# EAGLE board power_supply (EAGLE 8.2.2)
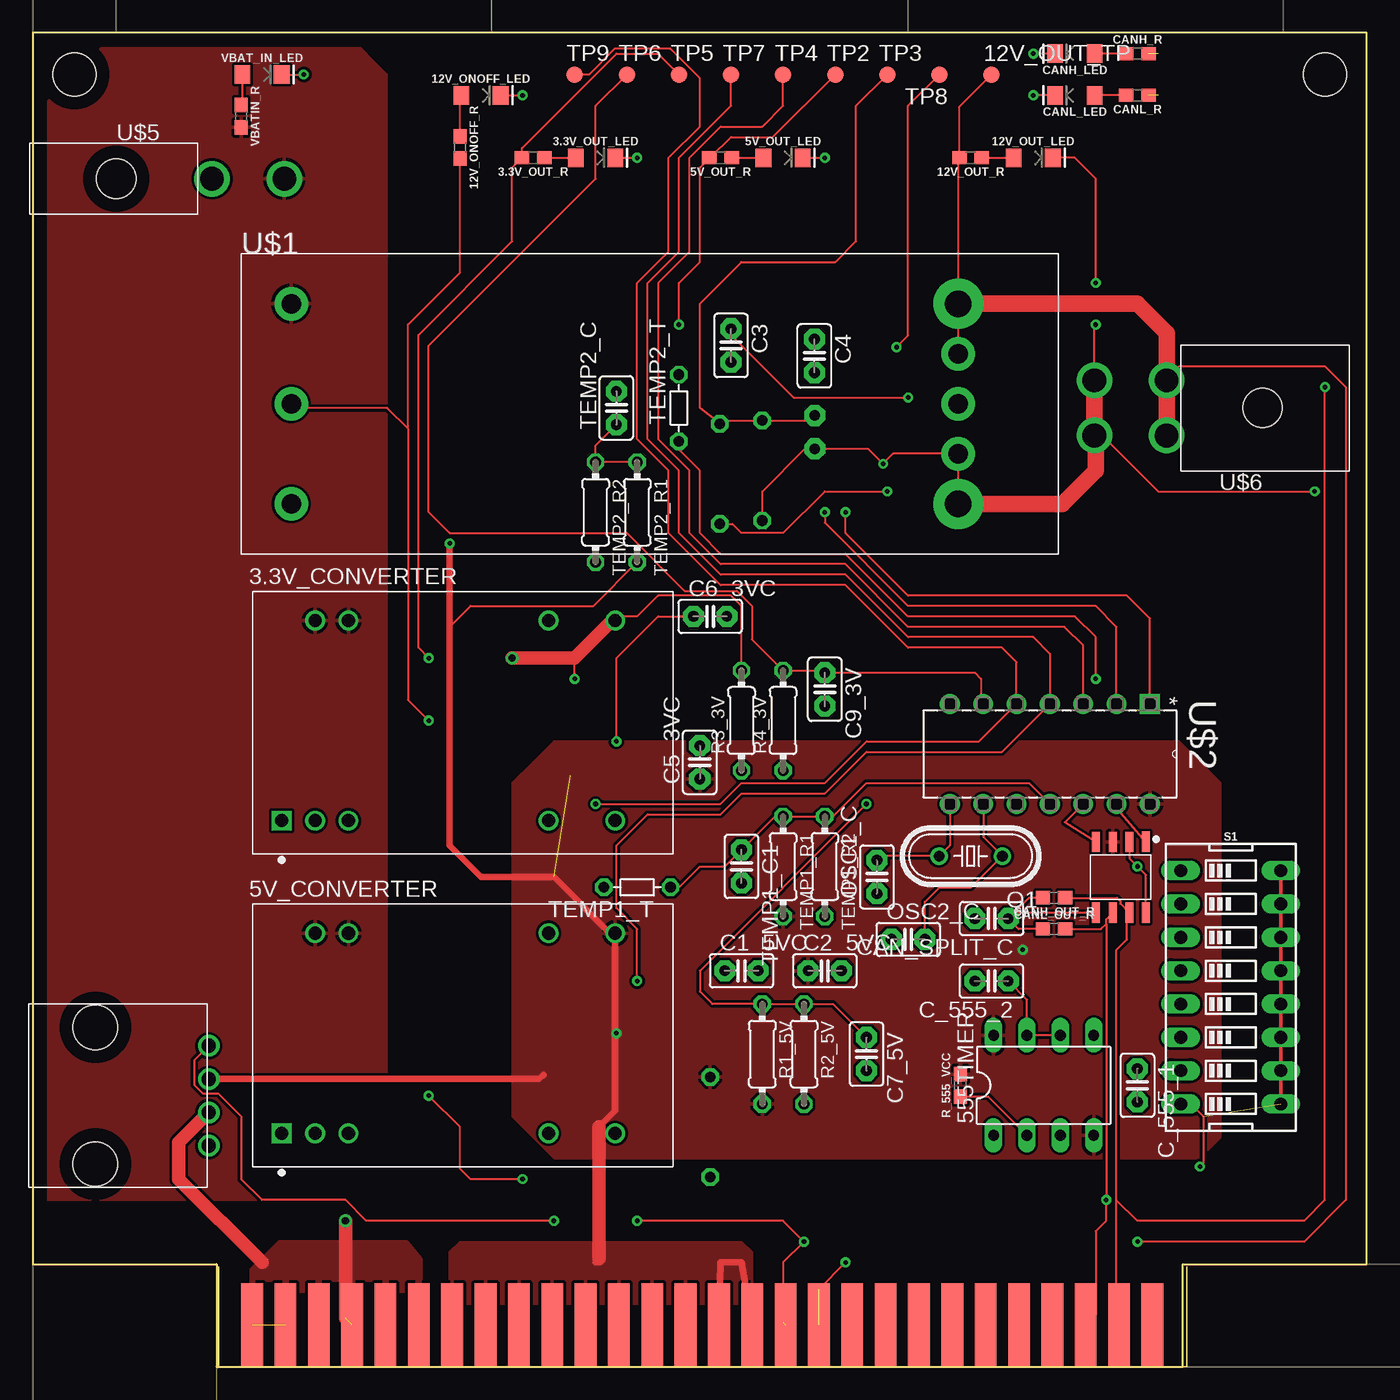
[diagram p0: board, top side]
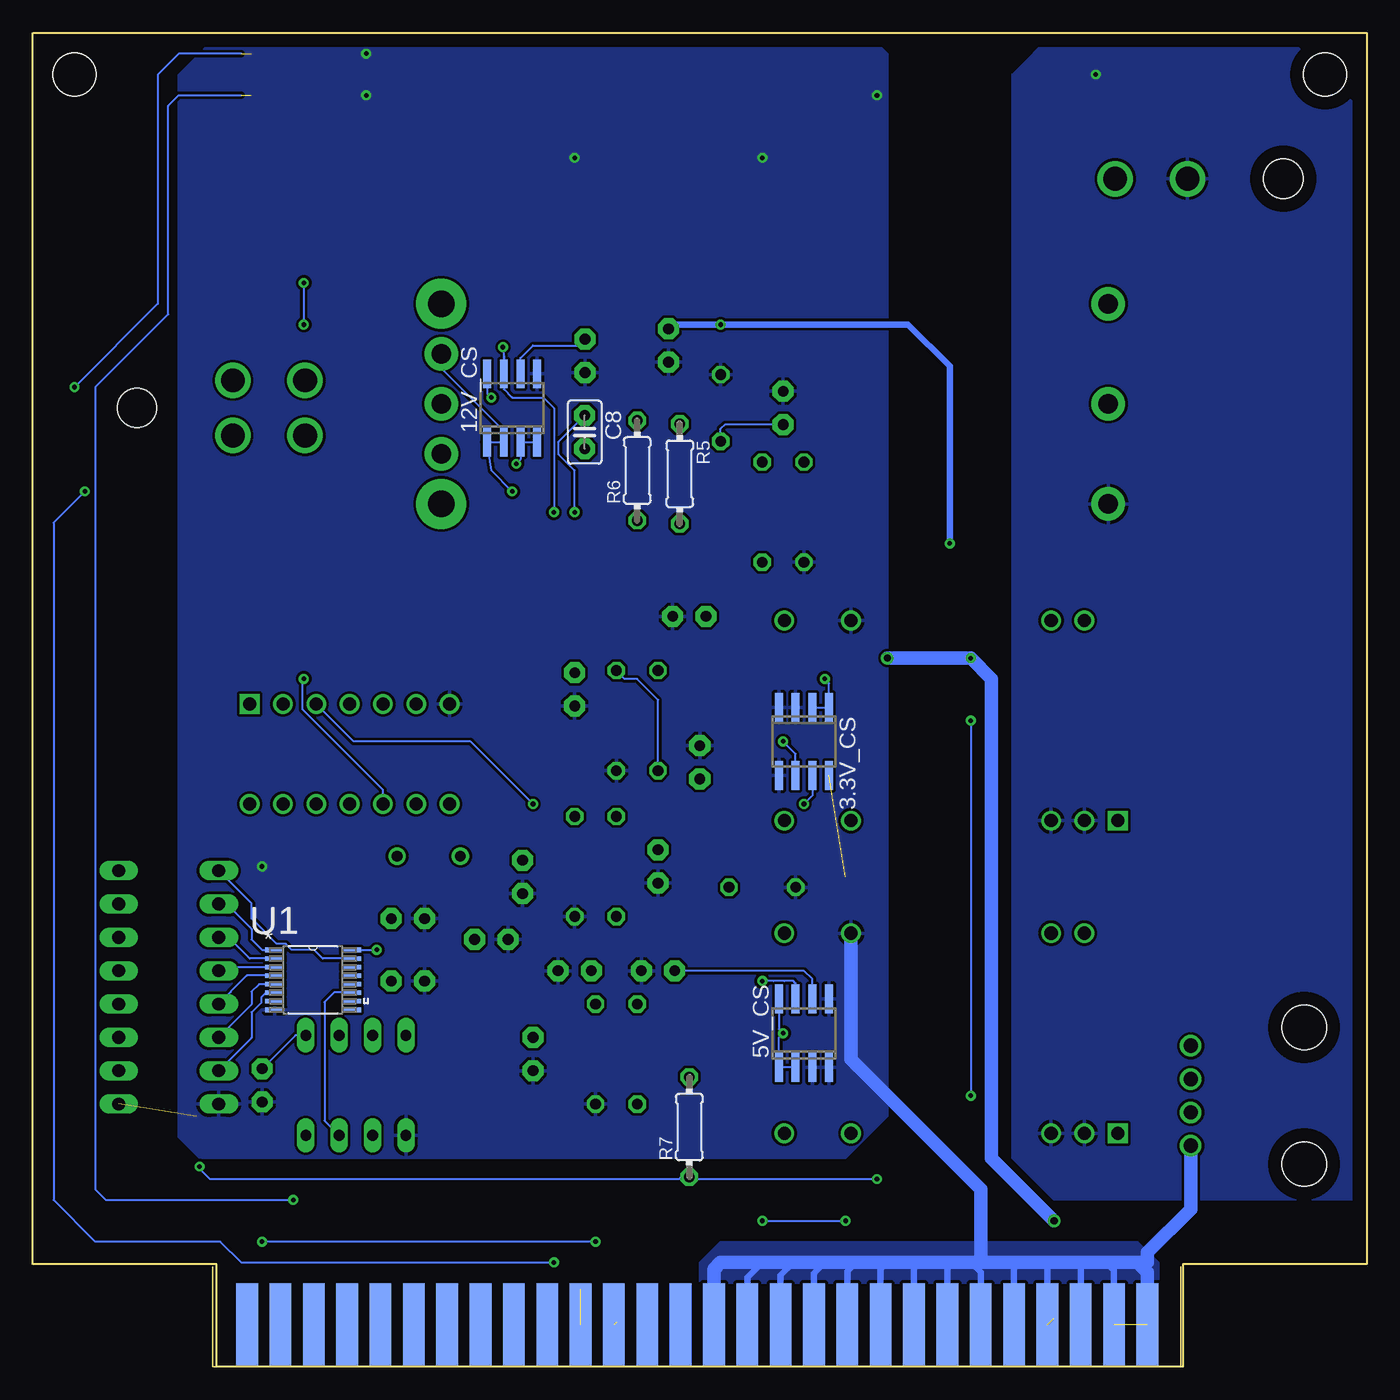
[diagram p1: board, bottom side, seen from below]

Size 101.6 x 101.6 mm. Coordinates in mm from the lower left corner, seen from the top.
Outline: 14,0 87.6,0 87.6,7.8 101.6,7.8 101.6,101.6 0,101.6 0,7.8 14,7.8 14,0
Copper layers (1*16): Top 0.035mm / dielectric 1.5mm / Bottom 0.035mm
Design rules "battery_balancer": minimum track width 6mil, minimum drill 0.35mm, track to track 0.205mm, track to pad 0.205mm, pad to pad 0.205mm, via to via 0.205mm, smd to smd 6mil, copper to edge 40mil, drill to drill 6mil, minimum pad ring 10mil, minimum via ring 8mil, stop-mask expansion 4mil, vias tented up to drill 0mil, thermal gap 10mil
Net classes: 1 3.3V_class: clearance 0.127 mm; 3 GND: clearance 0.025 mm
Holes 3.26 mm at 98.42,98.42 3.17,98.42

## Footprints (pad centres in the part's own frame; a part is rotated, then mirrored left to right if it is on the bottom)
CONV_NCS12S1203C = drill 1 square: 1 -12.79,-7.62 | drill 1: 2 -10.25,-7.62; 3 -7.71,-7.62; 9 7.53,-7.62; 11 12.61,-7.62; 14 12.61,7.62; 16 7.53,7.62; 22 -7.71,7.62; 23 -10.25,7.62
SOIC8 = smd 0.6 x 2.2: 1 -1.905,-2.6; 2 -0.635,-2.6; 3 0.635,-2.6; 4 1.905,-2.6; 5 1.905,2.6; 6 0.635,2.6; 7 -0.635,2.6; 8 -1.905,2.6
LED-1206 = smd 1.2 x 1.4: A -1.5,0; C 1.5,0
0603 = smd 1.1 x 1: 1 -0.85,0; 2 0.85,0
CONV_NCS12S1205C = drill 1 square: 1 -12.79,-7.62 | drill 1: 2 -10.25,-7.62; 3 -7.71,-7.62; 9 7.53,-7.62; 11 12.61,-7.62; 14 12.61,7.62; 16 7.53,7.62; 22 -7.71,7.62; 23 -10.25,7.62
B1,27 = smd 1.27 x 1.27: TP 0,0
DIL-08 = drill 0.813 long: 1 -3.81,-3.81; 2 -1.27,-3.81; 3 1.27,-3.81; 4 3.81,-3.81; 5 3.81,3.81; 6 1.27,3.81; 7 -1.27,3.81; 8 -3.81,3.81
C2.5-2 = drill 0.813 pad 1.6 octagon: 1 -1.27,0; 2 1.27,0
SOIC8' = smd 0.6 x 1.55: P$1 -3.83,-0.29; P$2 -2.57,-0.28; P$3 -1.29,-0.28; P$4 -0.02,-0.28; P$5 -0.02,5.11; P$6 -1.29,5.11; P$7 -2.57,5.11; P$8 -3.83,5.11
HC49/S = drill 0.813: 1 -2.413,0; 2 2.413,0
0204/7 = drill 0.813 octagon: 1 -3.81,0; 2 3.81,0
DIPSWITCH-08 = drill 0.97 long: 1 -8.89,-3.81; 2 -6.35,-3.81; 3 -3.81,-3.81; 4 -1.27,-3.81; 5 1.27,-3.81; 6 3.81,-3.81; 7 6.35,-3.81; 8 8.89,-3.81; 9 8.89,3.81; 10 6.35,3.81; 11 3.81,3.81; 12 1.27,3.81; 13 -1.27,3.81; 14 -3.81,3.81; 15 -6.35,3.81; 16 -8.89,3.81
R-5 = drill 0.813 octagon: 1 -2.54,0; 2 2.54,0
SOP65P640X120-16N = smd 1.473 x 0.356: 1 -2.921,2.286; 2 -2.921,1.626; 3 -2.921,0.965; 4 -2.921,0.33; 5 -2.921,-0.33; 6 -2.921,-0.965; 7 -2.921,-1.626; 8 -2.921,-2.286; 9 2.921,-2.286; 10 2.921,-1.626; 11 2.921,-0.965; 12 2.921,-0.33; 13 2.921,0.33; 14 2.921,0.965; 15 2.921,1.626; 16 2.921,2.286
UIE48T10120 = drill 1.5 pad 2.54: ON/OFF 3.81,11.43; TRIM 54.61,11.43; VIN(+) 3.81,19.05; VIN(-) 3.81,3.81; VOUT_SENSE(+) 54.61,15.24; VOUT_SENSE(-) 54.61,7.62 | drill 2 pad 3.81: VOUT(+) 54.61,19.05; VOUT(-) 54.61,3.81
DIP254P762X432-14 = drill 0.991 square: 1 -7.62,15.24 | drill 0.991: 2 -7.62,12.7; 3 -7.62,10.16; 4 -7.62,7.62; 5 -7.62,5.08; 6 -7.62,2.54; 7 -7.62,0; 8 0,0; 9 0,2.54; 10 0,5.08; 11 0,7.62; 12 0,10.16; 13 0,12.7; 14 0,15.24
5530843-6-BOARD = smd 1.651 x 6.35: 1 0.826,3.175; 3 3.365,3.175; 5 5.905,3.175; 7 8.445,3.175; 9 10.986,3.175; 11 13.525,3.175; 13 16.066,3.175; 15 18.605,3.175; 17 21.145,3.175; 19 23.686,3.175; 21 26.226,3.175; 23 28.765,3.175; 25 31.305,3.175; 27 33.846,3.175; 29 36.386,3.175; 31 38.925,3.175; 33 41.465,3.175; 35 44.005,3.175; 37 46.545,3.175; 39 49.086,3.175; 41 51.626,3.175; 43 54.166,3.175; 45 56.706,3.175; 47 59.245,3.175; 49 61.785,3.175; 51 64.326,3.175; 53 66.865,3.175; 55 69.406,3.175 | smd 1.651 x 6.35 bottom: 2 0.826,3.175; 4 3.365,3.175; 6 5.905,3.175; 8 8.445,3.175; 10 10.986,3.175; 12 13.525,3.175; 14 16.066,3.175; 16 18.605,3.175; 18 21.145,3.175; 20 23.686,3.175; 22 26.226,3.175; 24 28.765,3.175; 26 31.305,3.175; 28 33.846,3.175; 30 36.386,3.175; 32 38.925,3.175; 34 41.465,3.175; 36 44.005,3.175; 38 46.545,3.175; 40 49.086,3.175; 42 51.626,3.175; 44 54.166,3.175; 46 56.706,3.175; 48 59.245,3.175; 50 61.785,3.175; 52 64.326,3.175; 54 66.865,3.175; 56 69.406,3.175
5569-02A2 = drill 1.8: 1 7.3,0; 2 12.8,0 | hole 3: 0,0
5569-04A2 = drill 1.8: 1 7.3,-2.1; 2 7.3,2.1; 3 12.8,-2.1; 4 12.8,2.1 | hole 3: 0,0
70555-0003 = drill 1.092: 1 8.636,-3.81; 2 8.636,-1.27; 3 8.636,1.27; 4 8.636,3.81 | hole 3.4: 0,5.207; 0,-5.207

## Placement (x,y rotation side)
3.3V_CONVERTER  NCS12S1203C  [CONV_NCS12S1203C]  31.75,49.21 0 top
3.3V_CS  ACS712-LC  [SOIC8]  42.86,47.62 180 bottom
3.3V_OUT_LED  [LED-1206]  42.86,92.08 0 top
3.3V_OUT_R  330  [0603]  38.1,92.08 180 top
5V_CONVERTER  NCS12S1205C  [CONV_NCS12S1205C]  31.75,25.4 0 top
5V_CS  ACS712-LC  [SOIC8]  42.86,25.4 0 bottom
5V_OUT_LED  [LED-1206]  57.15,92.08 0 top
5V_OUT_R  330  [0603]  52.39,92.08 180 top
12V_CS  ACS712-LC  [SOIC8]  65.09,73.03 0 bottom
12V_ONOFF_LED  [LED-1206]  34.13,96.84 0 top
12V_ONOFF_R  330  [0603]  32.54,92.87 270 top
12V_OUT_LED  [LED-1206]  76.2,92.08 0 top
12V_OUT_R  330  [0603]  71.44,92.08 180 top
12V_OUT_TP  PTR1B1,27  [B1,27]  73.03,98.42 0 top
555TIMER  NE555  [DIL-08]  76.99,21.43 0 top
C1_5VC  1 nF  [C2.5-2]  53.98,30.16 0 top
C2_5VC  0.1 uF  [C2.5-2]  60.33,30.16 0 top
C3  0.1 uF  [C2.5-2]  53.18,77.79 270 top
C4  1 nF  [C2.5-2]  59.53,76.99 270 top
C5_3VC  0.1 uF  [C2.5-2]  50.8,46.04 90 top
C6_3VC  1 nF  [C2.5-2]  51.59,57.15 0 top
C7_5V  0.1 uF  [C2.5-2]  63.5,23.81 270 top
C8  0.1 uF  [C2.5-2]  59.56,71.18 270 bottom
C9_3V  0.1 uF  [C2.5-2]  60.33,51.59 270 top
C_555_1  10nF  [C2.5-2]  84.14,21.43 270 top
C_555_2  100 uF  [C2.5-2]  73.03,29.37 180 top
CAN_SPLIT_C  4700pF  [C2.5-2]  73.03,34.13 180 top
CANH_LED  [LED-1206]  79.38,100.01 180 top
CANH_OUT_R  60  [0603]  77.79,35.72 180 top
CANH_R  330  [0603]  84.14,100.01 0 top
CANL_LED  [LED-1206]  79.38,96.84 180 top
CANL_OUT_R  60  [0603]  77.79,33.34 0 top
CANL_R  330  [0603]  84.14,96.84 180 top
MCP2561  MCP2561  [SOIC8']  80.96,39.69 180 top
OSC1_C  1nF  [C2.5-2]  64.29,37.31 90 top
OSC2_C  1 nF  [C2.5-2]  66.67,32.54 0 top
Q1  [HC49/S]  71.44,38.89 180 top
R1_5V  [0204/7]  55.56,23.81 270 top
R2_5V  [0204/7]  58.74,23.81 270 top
R3_3V  [0204/7]  53.98,49.21 90 top
R4_3V  [0204/7]  57.15,49.21 90 top
R5  [0204/7]  52.32,68.01 270 bottom
R6  [0204/7]  55.56,68.26 90 bottom
R7  [0204/7]  51.59,18.26 90 bottom
R_555_VCC  10000  [0603]  70.64,21.43 90 top
S1  [DIPSWITCH-08]  91.25,28.89 270 top
TEMP1_C1  0.1 uF  [C2.5-2]  53.98,38.1 270 top
TEMP1_R1  [0204/7]  57.15,38.1 270 top
TEMP1_R2  [0204/7]  60.33,38.1 270 top
TEMP1_T  THERMISTOR-5  [R-5]  46.04,36.51 180 top
TEMP2_C  0.1 uF  [C2.5-2]  44.45,73.03 90 top
TEMP2_R1  [0204/7]  46.04,65.09 270 top
TEMP2_R2  [0204/7]  42.86,65.09 270 top
TEMP2_T  THERMISTOR-5  [R-5]  49.21,73.03 90 top
TP2  PTR1B1,27  [B1,27]  61.12,98.42 0 top
TP3  PTR1B1,27  [B1,27]  65.09,98.42 0 top
TP4  PTR1B1,27  [B1,27]  57.15,98.42 0 top
TP5  PTR1B1,27  [B1,27]  49.21,98.42 0 top
TP6  PTR1B1,27  [B1,27]  45.24,98.42 0 top
TP7  PTR1B1,27  [B1,27]  53.18,98.42 0 top
TP8  PTR1B1,27  [B1,27]  69.06,98.42 180 top
TP9  PTR1B1,27  [B1,27]  41.27,98.42 0 top
U1  SN74HC595PW  [SOP65P640X120-16N]  80.26,29.46 0 bottom
U$1  UIE48T10120  [UIE48T10120]  15.88,61.91 0 top
U$2  MCP25020-I/P  [DIP254P762X432-14]  69.85,42.86 270 top
U$4  5530843-6-STS  [5530843-6-BOARD]  15.88,0 0 top
U$5  39-30-1020  [5569-02A2]  6.35,90.49 0 top
U$6  39-30-1040  [5569-04A2]  93.66,73.03 180 top
U$7  70555-0003  [70555-0003]  4.76,20.64 0 top
VBAT_IN_LED  [LED-1206]  17.46,98.42 0 top
VBATIN_R  330  [0603]  15.88,95.25 270 top

## Library data of the parts
3.3V_CONVERTER U$1 = NCS12S1205C
3.3V_CS 5V_CS 12V_CS = allegro-2
3.3V_OUT_LED 5V_OUT_LED 12V_ONOFF_LED 12V_OUT_LED CANH_LED CANL_LED VBAT_IN_LED = SparkFun-LED
3.3V_OUT_R 5V_OUT_R 12V_ONOFF_R 12V_OUT_R CANH_OUT_R CANH_R CANL_OUT_R CANL_R R_555_VCC VBATIN_R = SparkFun-Resistors; PROD_ID: RES-08609
5V_CONVERTER = NCS12S1205C; AVAILABILITY: Bad; DESCRIPTION: Isolated Board Mount DC/DC Converter%2C DIP%2C Fixed%2C Through Hole%2C 12 W%2C 5 V%2C 2.4 A; MF: Murata Power Solutions; MP: NCS12S1205C; PACKAGE: DIP-8 Murata Power Solutions; PRICE: 28.15 USD
12V_OUT_TP TP2-TP9 = testpad
555TIMER = st-microelectronics; MF: Arrow Electronics; MPN: NE555N; OC_FARNELL: 1467742; OC_NEWARK: 89K1486
C1_5VC C2_5VC C3 C4 C5_3VC C6_3VC C7_5V C8 C9_3V C_555_1 C_555_2 CAN_SPLIT_C OSC1_C OSC2_C TEMP1_C1 TEMP2_C = capacitor-wima
MCP2561 = MCP2561; AVAILABILITY: Warning; DESCRIPTION: MCP2561 Series 5.5 V 8 Mbps High-Speed CAN Flexible Data Rate Transceiver-SOIC-8; MF: Microchip; MP: MCP2561FD-E/SN; PACKAGE: SOIC-8 Microchip; PRICE: 0.91 USD
Q1 = crystal; OC_FARNELL: 1667008; OC_NEWARK: unknown
R1_5V R2_5V R3_3V R4_3V R5-R7 TEMP1_R1 TEMP1_R2 TEMP2_R1 TEMP2_R2 = eagle-ltspice; SPICEMODEL: NONE; SPICEPREFIX: R
S1 = SparkFun-Switches; PROD_ID: SWCH-12197; SF_SKU: COM-08034
TEMP1_T TEMP2_T = varistor
U1 = SN74HC595PW; AVAILABILITY: Good; DESCRIPTION: Shift Register Single 8-Bit Serial to Serial/Parallel 16-Pin TSSOP Tube; MF: Texas Instruments; MP: SN74HC595PW; PACKAGE: SOIC-16 Texas Instruments; PRICE: 0.29 USD
U$2 = MCP25020-I_P; AVAILABILITY: Good; DESCRIPTION: Integrated circuit%3A CAN controller%3B 1Mbps%3B 2.7%C3%B75.5VDC%3B DIP14; MF: Microchip; MP: MCP25020-I/P; PACKAGE: DIP-14 Microchip; PRICE: 2.18 USD
U$4 = te-connectivity
U$5-U$7 = molex

## Nets
3.3V_ANA_CUR_OUT: 3.3V_CS.7 TP9.TP U$2.5
3.3V_OUT [3.3V_class]: 3.3V_CONVERTER.14 3.3V_CS.1 3.3V_CS.2 3.3V_OUT_R.2 R3_3V.2 TP5.TP U$4.1 U$4.3 U$4.5 U$4.7 U$4.9 U$4.11 U$7.2
3.3V_OUT_LED: 3.3V_OUT_LED.A 3.3V_OUT_R.1
3V_VOL_ANA_OUT: C9_3V.1 R3_3V.1 R4_3V.2 TP6.TP U$2.6
5V_CUR_ANA_OUT: 5V_CS.7 TP7.TP U$2.4
5V_OUT_LED: 5V_OUT_LED.A 5V_OUT_R.1
5V_VOL_ANA_OUT: C7_5V.1 R1_5V.1 R2_5V.1 TP4.TP U$2.3
12V_CON_ONOFF: 12V_ONOFF_R.2 R7.1 S1.9 S1.10 S1.11 S1.12 S1.13 S1.14 S1.15 S1.16 U$1.ON/OFF
12V_CUR_ANA_OUT: 12V_CS.7 TP8.TP U$2.1
12V_FILTER: 12V_CS.6 C4.1
12V_GND: 12V_CS.3 12V_CS.4 12V_OUT_LED.C C8.2 R6.1 U$1.VOUT(-) U$1.VOUT_SENSE(-) U$4.35 U$6.3 U$6.4
12V_ONOFF_LED: 12V_ONOFF_LED.A 12V_ONOFF_R.1
12V_OUT: 12V_CS.1 12V_CS.2 12V_OUT_R.2 12V_OUT_TP.TP R5.2 U$1.VOUT(+) U$1.VOUT_SENSE(+) U$4.33 U$6.1 U$6.2 U$7.4
12V_OUT_LED: 12V_OUT_LED.A 12V_OUT_R.1
12V_VOL_ANA_OUT: C8.1 R5.1 R6.2 TP3.TP U$2.2
555_CON: 555TIMER.5 C_555_1.1
555_TREDIS: 555TIMER.6 555TIMER.7 C_555_2.1
555_TRIG: 555TIMER.2 R_555_VCC.1
CAN_SPLIT: CAN_SPLIT_C.1 CANH_OUT_R.2 CANL_OUT_R.1 MCP2561.P$5
CANH_LED: CANH_LED.A CANH_R.1
CANH_OUT: CANH_OUT_R.1 CANH_R.2 MCP2561.P$7 U$4.53
CANL_LED: CANL_LED.A CANL_R.2
CANL_OUT: CANL_OUT_R.2 CANL_R.1 MCP2561.P$6 U$4.51
FILTER_3V: 3.3V_CS.6 C6_3VC.1
FILTER_5V: 5V_CS.6 C1_5VC.1
GND [GND]: 3.3V_CONVERTER.16 3.3V_CS.3 3.3V_CS.4 3.3V_CS.5 3.3V_OUT_LED.C 5V_CONVERTER.16 5V_CS.3 5V_CS.4 5V_CS.5 5V_OUT_LED.C 12V_CS.5 12V_ONOFF_LED.C 555TIMER.1 C1_5VC.2 C2_5VC.2 C3.2 C4.2 C5_3VC.2 C6_3VC.2 C7_5V.2 C9_3V.2 C_555_1.2 C_555_2.2 CAN_SPLIT_C.2 CANH_LED.C CANL_LED.C MCP2561.P$2 MCP2561.P$8 OSC1_C.1 OSC2_C.1 R2_5V.2 R4_3V.1 S1.8 TEMP1_C1.2 TEMP1_R2.2 TEMP1_T.2 TEMP2_C.2 TEMP2_R2.2 TEMP2_T.2 U1.8 U$2.7 U$4.2 U$4.4 U$4.6 U$4.8 U$4.10 U$4.12 U$4.14 U$4.16 U$4.18 U$4.20 U$4.22 U$4.24 U$4.26 U$4.28 U$7.1
N$8: MCP2561.P$4 U$2.12
N$14: MCP2561.P$1 U$2.13
NAND1: S1.1 U1.15
NAND2: S1.2 U1.1
NAND3: S1.3 U1.2
NAND4: S1.4 U1.3
NAND5: S1.5 U1.4
NAND6: S1.6 U1.5
NAND7: S1.7 U1.6
OSC1: OSC1_C.2 Q1.2 U$2.8
OSC2: OSC2_C.2 Q1.1 U$2.9
OUT555: 555TIMER.3 U1.11
TEMP1_ANA_OUT: TEMP1_C1.1 TEMP1_R1.1 TEMP1_R2.1 TEMP1_T.1 U$2.11
TEMP2_ANA_OUT: TEMP2_C.1 TEMP2_R1.1 TEMP2_R2.1 TEMP2_T.1 U$2.10
V_BAT_BAL+: 3.3V_CONVERTER.22 3.3V_CONVERTER.23 5V_CONVERTER.22 5V_CONVERTER.23 U$1.VIN(+) U$5.2 VBATIN_R.2
V_BAT_BAL-: 3.3V_CONVERTER.2 3.3V_CONVERTER.3 5V_CONVERTER.2 5V_CONVERTER.3 U$1.VIN(-) U$5.1 VBAT_IN_LED.C
VBAT_IN_LED: VBAT_IN_LED.A VBATIN_R.1
VCC: 3.3V_CS.8 5V_CONVERTER.14 5V_CS.1 5V_CS.2 5V_CS.8 5V_OUT_R.2 12V_CS.8 555TIMER.4 555TIMER.8 C2_5VC.1 C3.1 C5_3VC.1 MCP2561.P$3 R1_5V.2 R7.2 R_555_VCC.2 TEMP1_R1.2 TEMP2_R1.2 TP2.TP U1.16 U$2.14 U$4.13 U$4.15 U$4.17 U$4.19 U$4.21 U$4.23 U$4.25 U$4.27 U$4.29 U$4.31 U$7.3

## Tracks (layer width: path | path; a pad name or v marks a point on that pad's centre or on a via)
3.3V_ANA_CUR_OUT  (via drill 0.35)
  Top 0.152: v42.86,42.86 52.39,42.86 53.98,44.45 60.33,44.45 63.5,47.62 72.07,47.62 U$2.5 74.93,53.66 73.82,54.77 66.67,54.77 61.91,59.53 52.39,59.53 48.42,63.5 48.42,68.26 46.04,70.64 46.04,82.55 48.42,84.93 48.42,92.08 50.8,94.46 50.8,98.13 48.56,100.37 44.3,100.37 42.36,98.42 TP9.TP
  Bottom 0.152: 3.3V_CS.7 42.23,43.5 v42.86,42.86
3.3V_OUT  (via drill 0.35, 0.55, 0.55 pad 0.55)  (2 unrouted)
  Top 0.152: 3.3V_CONVERTER.14 44.68,57.15 46.04,57.15 47.62,58.74 53.18,58.74 53.98,57.94 R3_3V.2 | v41.27,52.39 41.27,53.98 | TP5.TP 47.62,100.01 44.45,100.01 37.25,92.81 3.3V_OUT_R.2 36.51,91.34 36.51,85.72 29.37,78.58 29.37,54.77 v30.16,53.98
  Top 1.016: U$7.2 11.11,17.08 11.11,14.29 17.46,7.94 | 3.3V_CONVERTER.14 44.13,56.83 41.27,53.98 v36.51,53.98 | v23.81,11.11 23.81,3.68
  Bottom 0.152: 3.3V_CS.2 3.3V_CS.1 40.96,52.07 v41.27,52.39
  Bottom 1.016: v36.51,53.98 v30.16,53.98 28.57,52.39 28.57,15.88 v23.81,11.11
  pour Top: 16.76,6.35 16.76,7.37 18.8,9.4 28.45,9.4 29.46,8.13 29.46,5.84 16.76,5.84
3.3V_OUT_LED
  Top 0.152: 3.3V_OUT_R.1 3.3V_OUT_LED.A
3V_VOL_ANA_OUT
  Top 0.152: TP6.TP 42.86,96.04 42.86,90.49 30.16,77.79 30.16,65.09 31.75,63.5 45.24,63.5 49.65,59.09 53.62,59.09 54.77,57.94 54.77,55.4 R4_3V.2 60.17,53.02 C9_3V.1 71.75,52.86 72.23,52.39 72.23,50.64 U$2.6
  Bottom 0.152: R3_3V.1 53.98,50.8 55.56,52.39 56.52,52.39 R4_3V.2
5V_CUR_ANA_OUT  (via drill 0.35)
  Top 0.152: TP7.TP 53.18,96.04 49.21,92.08 49.21,84.93 46.83,82.55 46.83,70.64 49.21,68.26 49.21,63.5 52.39,60.33 61.91,60.33 66.67,55.56 76.2,55.56 77.47,54.29 U$2.4 73.82,46.83 63.5,46.83 60.33,43.66 53.98,43.66 52.39,42.07 46.83,42.07 44.45,39.69 44.45,34.92 46.04,33.34 v46.04,29.37
  Bottom 0.152: 5V_CS.7 43.5,29.21 43.66,29.37 44.34,29.37 44.35,29.38 45.18,29.38 45.2,29.37 v46.04,29.37
5V_OUT_LED
  Top 0.152: 55.56,91.99 5V_OUT_LED.A 5V_OUT_R.1
5V_VOL_ANA_OUT  (via drill 0.35)
  Top 0.152: TP4.TP 57.15,96.04 55.56,94.46 52.39,94.46 50.01,92.08 50.01,84.93 47.62,82.55 47.62,70.64 50.01,68.26 50.01,63.5 52.39,61.12 61.91,61.12 66.67,56.36 78.58,56.36 80.01,54.93 U$2.3 | v63.5,42.86 50.8,30.16 50.8,28.57 51.75,27.62 R1_5V.1 R2_5V.1 60.96,27.62 C7_5V.1
  Bottom 0.152: U$2.3 77.15,47.62 68.26,47.62 v63.5,42.86
12V_CON_ONOFF  (via drill 0.35)  (1 unrouted)
  Top 0.152: 88.2,20 89.15,19.05 89.15,15.49 v88.9,15.24 | 28.57,71.44 26.99,73.03 20,73.03 U$1.ON/OFF | 28.57,71.44 28.57,79.38 32.54,83.34 12V_ONOFF_R.2 | v30.16,49.21 28.57,50.8 28.57,71.44 | v37.31,14.29 33.34,14.29 32.54,15.08 32.54,18.26 v30.16,20.64
  Top 0.254: S1.9 S1.10 S1.11 S1.12 S1.13 S1.14 S1.15 S1.16
  Bottom 0.152: v88.9,15.24 88.9,15.08 88.11,14.29 52.39,14.29 52.23,14.45 R7.1 51.44,14.29 v37.31,14.29 | v30.16,49.21 v30.16,20.64
12V_CUR_ANA_OUT  (via drill 0.35)
  Top 0.152: v61.91,65.09 61.91,63.5 66.67,58.74 83.34,58.74 85.09,56.99 U$2.1 85.09,50.64 | v65.79,77.66 66.67,78.55 66.67,96.04 TP8.TP
  Bottom 0.152: 65.72,77 12V_CS.7 | 12V_CS.7 65.72,77.6 v65.79,77.66 | 12V_CS.7 65.72,74.45 65.09,73.82 62.71,73.82 61.91,73.03 v61.91,65.09
12V_FILTER
  Bottom 0.152: 12V_CS.6 64.45,76.83 63.5,77.79 60.01,77.79 C4.1
12V_GND  (via drill 0.35)  (1 unrouted)
  Top 0.152: 59.88,5.91 v61.91,7.94 | U$1.VOUT(-) U$1.VOUT_SENSE(-) 65.53,69.53 v64.77,68.77 63.63,69.91 C8.2 58.74,69.85 55.56,66.67 R6.1 | U$6.4 81.47,70.92 85.72,66.67 v97.63,66.67 | v80.96,82.55 80.96,90.49 79.38,92.08 12V_OUT_LED.C | U$6.3 80.86,79.28 v80.96,79.38
  Top 1.27: U$6.3 U$6.4 80.96,70.83 80.96,68.26 78.42,65.72 U$1.VOUT(-)
  Bottom 0.152: v61.91,7.94 85.72,7.94 87.31,9.53 96.84,9.53 100.01,12.7 100.01,64.29 v97.63,66.67 | v64.77,68.77 64.45,69.09 12V_CS.3 12V_CS.4 | v80.96,82.55 v80.96,79.38
12V_ONOFF_LED
  Top 0.152: 12V_ONOFF_LED.A 32.54,96.75 12V_ONOFF_R.1
12V_OUT  (via drill 0.35)  (1 unrouted)
  Top 0.152: 57.15,3.37 57.15,7.94 v58.74,9.53 57.15,11.11 v46.04,11.11 | v84.14,9.53 96.84,9.53 100.01,12.7 100.01,74.61 98.42,76.2 87.31,76.2 86.36,75.25 U$6.1 | U$1.VOUT_SENSE(+) U$1.VOUT(+) 70.48,91.97 12V_OUT_R.2 70.59,95.99 12V_OUT_TP.TP | R5.2 53.28,64.2 53.98,63.5 57.15,63.5 60.33,66.67 v65.09,66.67 | v39.69,11.11 25.4,11.11 23.81,12.7 17.46,12.7 15.88,14.29 15.88,19.05 14.12,20.81 12.94,20.81 12.3,21.45 12.3,23.35 U$7.4
  Top 1.27: U$6.2 U$6.1 86.36,78.74 84.14,80.96 U$1.VOUT(+)
  Bottom 0.152: v58.74,9.53 v84.14,9.53 | 12V_CS.1 12V_CS.2 65.72,71.28 70.64,76.2 70.64,76.99 U$1.VOUT_SENSE(+) | v65.09,66.67 66.67,68.26 12V_CS.1 | v46.04,11.11 v39.69,11.11 | 12V_CS.1 67.25,70.42
12V_OUT_LED
  Top 0.152: 12V_OUT_R.1 12V_OUT_LED.A
12V_VOL_ANA_OUT  (via drill 0.35)
  Top 0.152: 59.75,72.45 C8.1 59.18,72.07 R6.2 52.58,72.07 R5.1 50.8,73.03 50.8,80.96 53.98,84.14 61.12,84.14 62.71,85.72 62.71,96.04 TP3.TP | v60.33,65.09 60.33,64.29 66.67,57.94 80.96,57.94 82.55,56.36 U$2.2
  Bottom 0.152: v60.33,65.09 60.33,68.26 61.55,69.49 61.55,70.46 C8.1
555_CON
  Bottom 0.152: 555TIMER.5 81.6,25.24 C_555_1.1
555_TREDIS
  Top 0.152: 555TIMER.6 555TIMER.7 75.72,27.94 C_555_2.1
555_TRIG
  Top 0.152: R_555_VCC.1 72.76,20.58 555TIMER.2
CAN_SPLIT
  Top 0.152: CANH_OUT_R.2 75.88,35.72 CAN_SPLIT_C.1 | CANL_OUT_R.1 75.09,33.34 CAN_SPLIT_C.1 | MCP2561.P$5 74.74,34.58 CAN_SPLIT_C.1
CANH_LED
  Top 0.152: CANH_R.1 CANH_LED.A
CANH_OUT  (via drill 0.35)  (1 unrouted)
  Top 0.152: 82.55,12.69 82.55,3.37 U$4.53 | v98.42,74.61 98.42,12.7 96.84,11.11 84.12,11.11 82.55,12.69 | 82.55,12.69 82.55,31.75 83.34,32.54 83.34,34.39 MCP2561.P$7 82.83,35.28 82.83,35.47 82.58,35.72 CANH_OUT_R.1
  Bottom 0.152: 85.72,100.01 90.49,100.01 92.08,98.42 92.08,80.96 v98.42,74.61
CANL_LED
  Top 0.152: CANL_R.2 CANL_LED.A
CANL_OUT  (via drill 0.35)  (1 unrouted)
  Top 0.152: U$4.51 80.96,3.94 80.96,10.32 81.76,11.11 v81.76,12.7 81.76,33.73 | 81.76,33.73 81.76,34.08 MCP2561.P$6 | CANL_OUT_R.2 81.36,33.34 81.76,33.73
  Bottom 0.152: 85.72,96.84 90.49,96.84 91.28,96.04 91.28,80.17 96.84,74.61 96.84,13.49 96.04,12.7 v81.76,12.7
FILTER_3V  (via drill 0.35)
  Top 0.152: 49.21,57.15 C6_3VC.1 47.62,57.15 44.45,53.98 v44.45,47.62
  Bottom 0.152: 3.3V_CS.6 43.5,46.67 v44.45,47.62
FILTER_5V
  Bottom 0.152: 5V_CS.6 42.23,29.53 42.86,30.16 C1_5VC.1
GND  (via drill 0.35)
  Top 0.152: CANH_LED.C v76.2,100.01 | CANL_LED.C v76.2,96.84 | 5V_OUT_LED.C v60.33,92.08 | 12V_ONOFF_LED.C v37.31,96.84 | 3.3V_OUT_LED.C v46.04,92.08 | MCP2561.P$2 83.53,38.7 v84.14,38.1 84.79,37.45 MCP2561.P$8
  Bottom 0.508: U$4.4 19.24,7.33 19.84,7.94 | U$4.6 21.78,7.49 22.23,7.94 | U$4.8 24.32,7.65 24.61,7.94 | U$4.10 26.86,7.81 26.99,7.94 | U$4.12 29.4,7.18 30.16,7.94 | U$4.14 31.94,7.75 31.75,7.94 | U$4.16 34.48,7.59 34.13,7.94 | U$4.18 37.02,7.43 36.51,7.94 | U$4.20 39.56,7.27 38.89,7.94 | U$4.22 42.1,7.11 41.27,7.94 | U$4.24 44.64,6.95 43.66,7.94 | U$4.26 47.18,6.79 46.04,7.94
  Bottom 1.016: U$7.1 13.4,12 16.7,8.7 16.7,7.94 17.46,7.94 | 17.46,7.94 19.84,7.94 22.23,7.94 24.61,7.94 26.99,7.94 29.37,7.94 | 29.37,7.94 30.16,7.94 31.75,7.94 34.13,7.94 36.51,7.94 38.89,7.94 41.27,7.94 43.66,7.94 46.04,7.94 49.21,7.94 49.72,7.43 U$4.28 | 5V_CONVERTER.16 39.28,23.41 29.4,13.53 29.4,7.97 29.37,7.94 | U$4.2 16.7,7.18 17.46,7.94
  pour Bottom: 15.88,6.35 50.8,6.35 50.8,7.94 49.21,9.53 17.46,9.53 15.88,7.94
  pour Bottom: 36.51,100.01 36.51,19.05 39.69,15.88 88.9,15.88 90.49,17.46 90.49,98.42 87.31,101.6 38.1,101.6
N$8
  Top 0.152: MCP2561.P$4 78.6,41.45 U$2.12
N$14
  Top 0.152: MCP2561.P$1 82.41,42.72 U$2.13
NAND1
  Bottom 0.152: U1.15 79.51,31.09 80.17,31.75 81.87,31.75 82.33,32.21 83.01,32.21 84.93,34.13 84.93,35.27 S1.1
NAND2
  Bottom 0.152: 86.84,35.24 S1.2 86.84,35.24 | 86.84,35.24 84.93,33.34 84.93,32.54 84.14,31.75 U1.1
NAND3
  Bottom 0.152: U1.2 85.06,31.09 86.52,32.54 87.28,32.54 S1.3
NAND4
  Bottom 0.152: U1.3 87.17,30.43 S1.4
NAND5
  Bottom 0.152: U1.4 85.3,29.79 86.52,28.57 86.52,28.54 S1.5
NAND6
  Bottom 0.152: U1.5 84.37,29.13 84.93,28.57 84.93,27.59 S1.6
NAND7
  Bottom 0.152: 84.2,27.78 84.2,28.13 83.84,28.5 U1.6 | 84.2,27.78 84.2,27.72 | 84.2,27.78 84.2,27.72 | 84.2,27.72 84.93,26.99 84.93,25.05 S1.7
OSC1
  Top 0.152: U$2.8 69.85,39.72 Q1.2 64.61,38.89 OSC1_C.2
OSC2
  Top 0.152: U$2.9 72.39,40.35 Q1.1 71.47,36.51 69.06,36.51 67.94,35.4 OSC2_C.2
OUT555
  Bottom 0.152: U1.11 78.66,28.5 79.38,27.78 79.38,18.73 555TIMER.3
TEMP1_ANA_OUT
  Top 0.152: TEMP1_T.1 49.21,36.51 50.8,38.1 52.7,38.1 TEMP1_C1.1 56.52,41.91 TEMP1_R1.1 TEMP1_R2.1 60.96,41.91 63.5,44.45 75.88,44.45 U$2.11
TEMP2_ANA_OUT  (via drill 0.35)
  Top 0.152: TEMP2_C.1 42.86,70.17 TEMP2_R2.1 TEMP2_R1.1 | TEMP2_T.1 49.21,69.85 50.8,68.26 50.8,63.5 52.39,61.91 61.91,61.91 66.67,57.15 79.38,57.15 80.96,55.56 v80.96,52.39
  Bottom 0.152: TEMP2_T.1 49.21,71.44 48.9,71.75 TEMP2_C.1 | 74.93,43.18 U$2.10 74.93,43.95 81.04,50.06 81.04,52.31 v80.96,52.39
V_BAT_BAL+
  pour Top: 23.81,101.6 6.35,101.6 0,95.25 0,12.7 23.81,12.7 26.99,15.88 26.99,98.42
V_BAT_BAL-  (via drill 0.35)
  Top 0.152: VBAT_IN_LED.C v20.64,98.42
  pour Bottom: 0,12.7 23.81,12.7 26.99,15.88 26.99,98.42 23.81,101.6 6.35,101.6 0,95.25
VBAT_IN_LED
  Top 0.152: VBAT_IN_LED.A 15.96,96.19 VBATIN_R.1
VCC  (via drill 0.35)  (1 unrouted)
  Top 0.152: TP2.TP 56.36,93.66 53.18,93.66 51.59,92.08 5V_OUT_R.2 50.8,91.34 50.8,84.14 49.21,82.55 v49.21,79.38 | 31.75,55.56 31.75,56.36 33.34,57.94 42.7,57.94 TEMP2_R1.2 | C3.1 53.18,78.58 57.94,73.82 v66.67,73.82
  Top 0.508: v31.75,62.71 31.75,55.56 31.75,39.69 34.13,37.31 39.69,37.31 43.97,33.02 5V_CONVERTER.14 44.36,19.5 43.15,18.28 | U$7.3 38.58,21.91 38.89,22.23 | 43.15,8.22 42.86,7.94 | U$4.31 53.98,7.94 52.39,7.94 U$4.29
  Top 1.016: 43.15,18.28 43.15,8.22
  Bottom 0.152: U1.16 v75.41,31.75 | 5V_CS.8 44.77,25.72 v44.45,25.4 44.77,25.08 5V_CS.1 5V_CS.2 | 12V_CS.8 66.99,74.14 v66.67,73.82
  Bottom 0.508: v31.75,62.71 31.75,76.2 34.92,79.38 v49.21,79.38 52.86,79.38 C3.1
  pour Top: 36.51,19.05 39.69,15.88 88.9,15.88 90.49,17.46 90.49,44.45 87.31,47.62 39.69,47.62 38.1,46.04 36.51,44.45
  pour Top: 31.75,4.76 31.75,8.73 32.54,9.53 53.98,9.53 54.77,8.73 54.77,4.76